# Altium PCB PCB1.PcbDoc
Units mil, origin at the board's own origin, x right, y up, seen from the top; angles counter-clockwise.
Board outline 2175 x 2390 mil, 2 copper layers (Top Layer, Bottom Layer); 56 components, 46 nets, 213 pads, 50 vias.
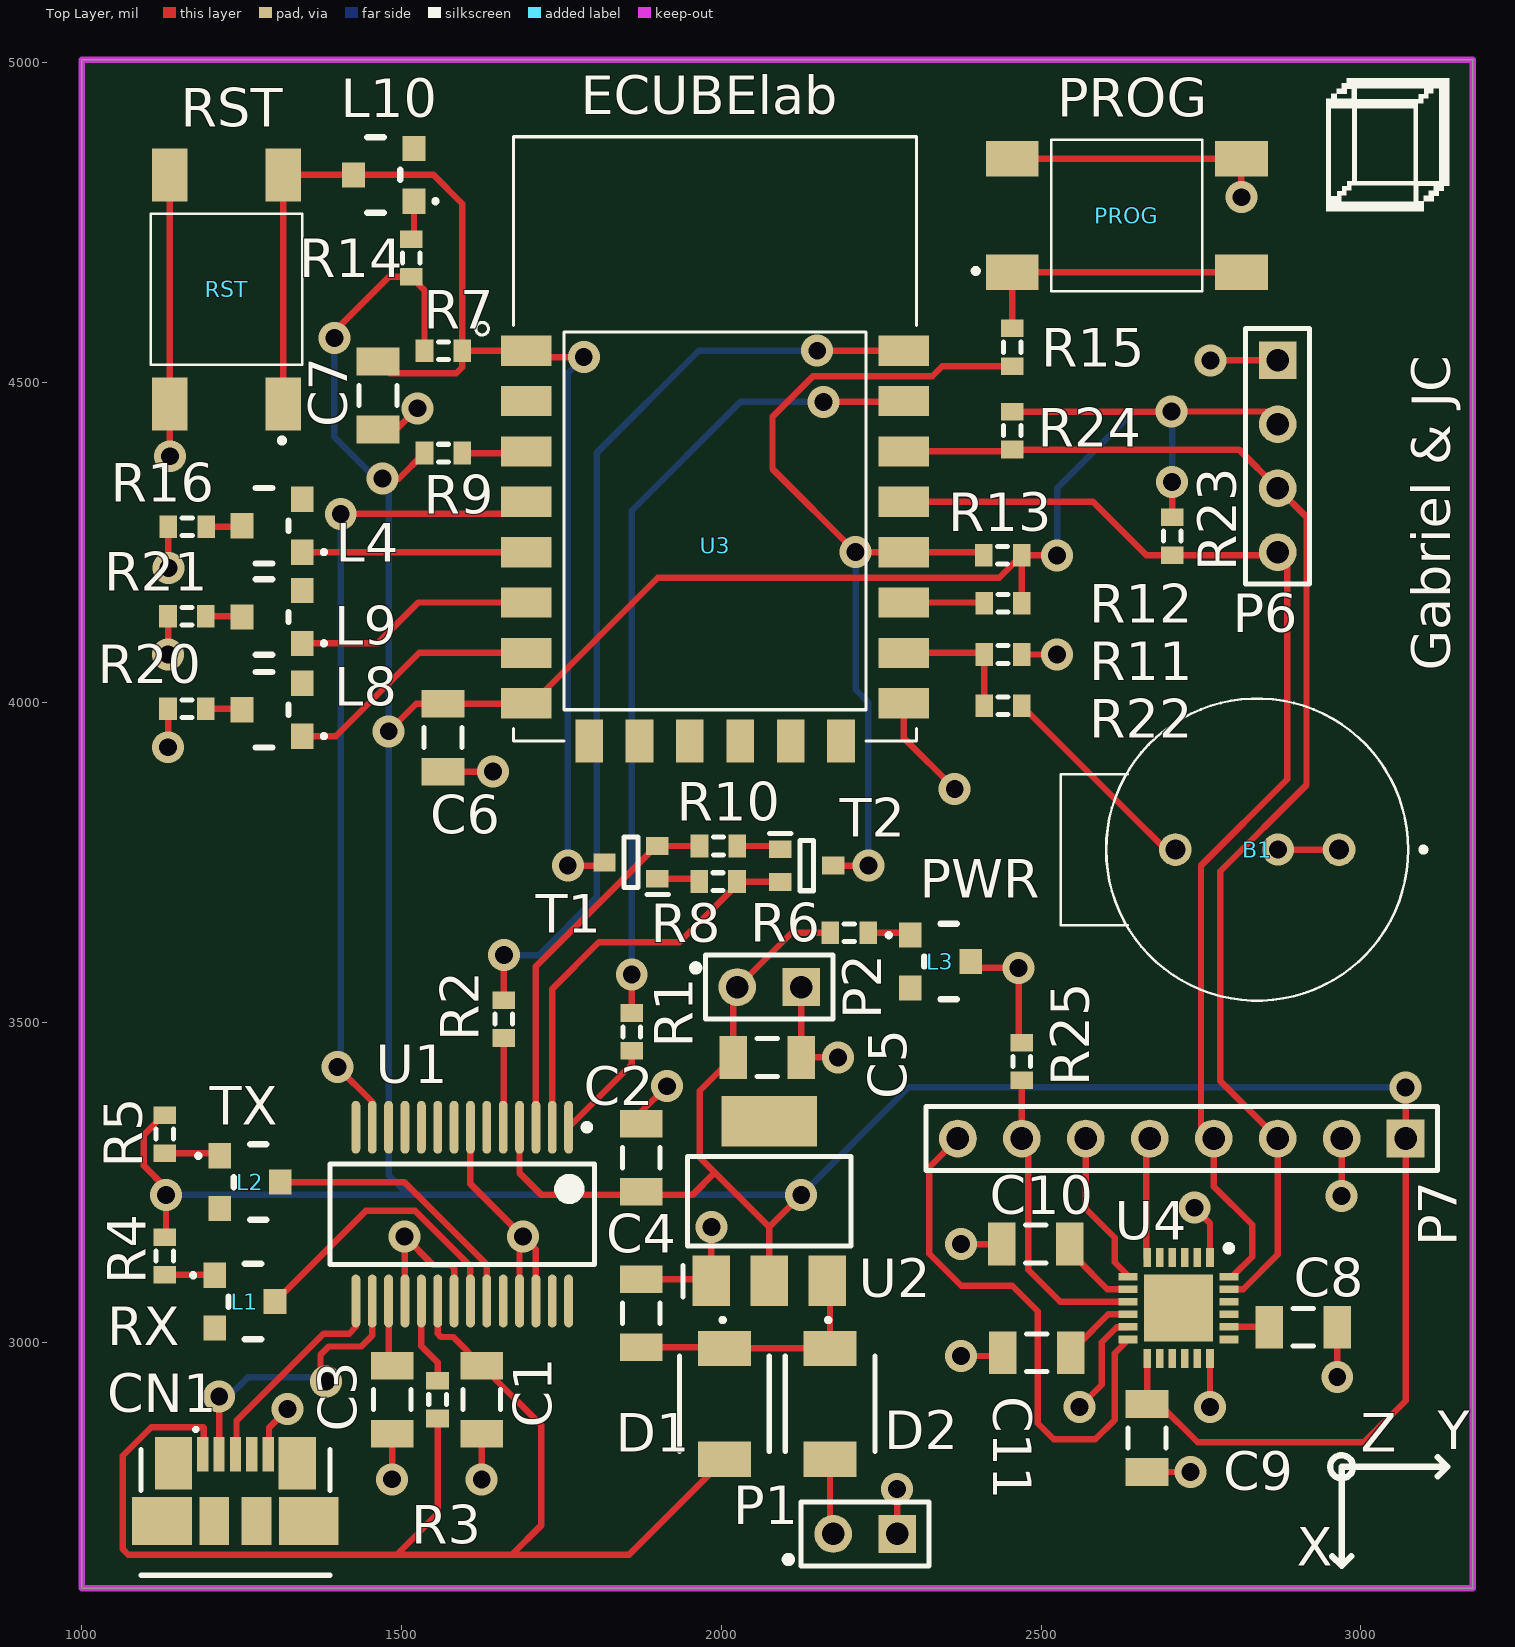
[diagram p0: Top Layer view]
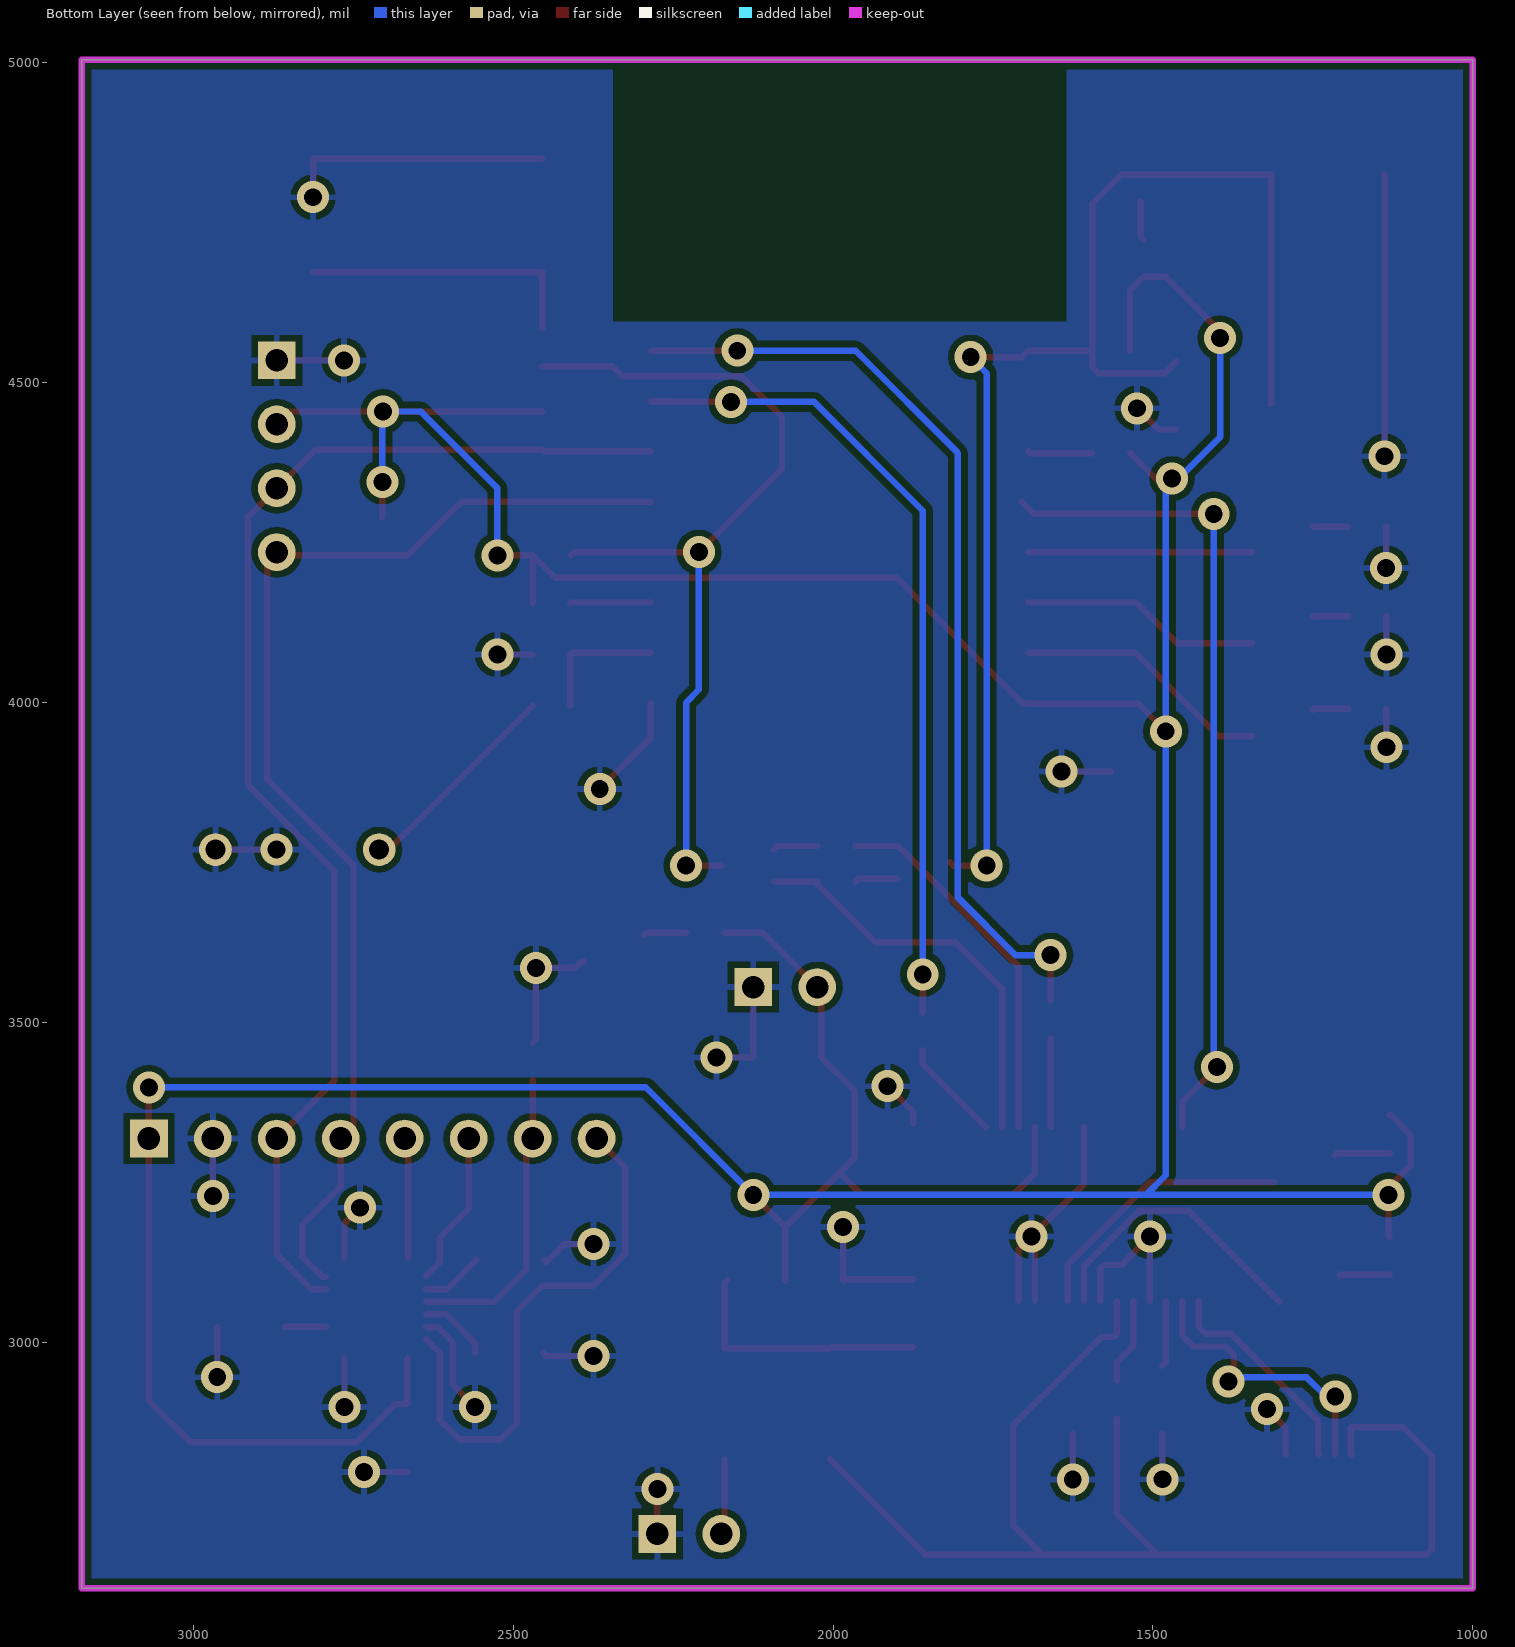
[diagram p1: Bottom Layer view, seen from below]

## Layer stack, top to bottom
Top Solder: solder mask 0.4, Solder Resist, Dk 3.5
Top Layer: signal copper 1.4
Dielectric 1: dielectric 12.6, FR-4, Dk 4.8
Bottom Layer: signal copper 1.4
Bottom Solder: solder mask 0.4, Solder Resist, Dk 3.5

## Board outline
1000,2615 3175,2615 3175,5005 1000,5005

## Design rules (kind name [scope] priority, off if disabled: settings)
Clearance [All] p1: gap=10 ignorepadtopadclearanceinfootprint=FALSE except(0: Arc-Hole Track-Hole SMDPad-Hole THPad-Hole Via-Hole Fill-Hole Poly-Hole Region-Hole Text-Hole)
PolygonConnect [All] p1: connectstyle=Relief reliefconductorwidth=10 reliefentries=4 polygonreliefangle="90 Angle" airgapwidth=10
RoutingVias [All] p1: holewidth=28 width=50 viastyle="Through Hole" minholewidth=28 minwidth=50 maxholewidth=28 maxwidth=50
SolderMaskExpansion [All] p1: expansion=4
Width [All] p1: maxlimit=10 minlimit=10 preferedwidth=10
30 further rules are at their usual default settings.

## Classes and differential pairs
component class usb_uart: C1 C2 C3 C4 C5 CN1 D1 D2 L1 L2 L3 P1 P2 R1 R2 R3 R4 R5 R6 U1 U2
component class processingsys: B1 C6 C7 i2c L4 L8 L9 L10 P6 PROG R7 R8 R9 R10 R11 R12 R13 R14 R15 R16 R20 R21 R22 R23 R24 RST T1 T2 U3
component class mpu6050: C8 C9 C10 C11 P7 R25 U4

## Components (designator, comment, footprint, x,y, rotation, side; value= is the part's Value field where it differs from the comment)
B1 "MCABT-408-RC" MCABT-408-RC 2965.91,3770 r180 top
C1 "Cap Semi" C1206 1625.43,2910 r90 top value=10uF
C2 "Cap Semi" C1206 1875,3288.15 r270 top value=10uF
C3 "Cap Semi" C1206 1485.43,2910 r90 top value=100nF
C4 "Cap Semi" C1206 1875,3045 r270 top value=10uF
C5 "Cap Semi" C1206 2071.85,3445 r0 top value=10uF
C6 "Cap Semi" C1206 1565,3945 r90 top value=47uF
C7 "Cap Semi" C1206 1463.28,4480 r90 top value=100nF
C8 "Cap Semi" C1206 2909.96,3023.19 r180 top value=2200pF
C9 "Cap Semi" C1206 2665.75,2850.04 r90 top value=100nF
C10 "Cap Semi" C1206 2491.81,3153.19 r0 top value=10nF
C11 "Cap Semi" C1206 2493.11,2983.19 r0 top value=100nF
CN1 "47346-1001" 47346-1001 1240.33,2635.35 r180 top
D1 "PMEG3020DEP,115" SOD-128 2005,2903.39 r270 top
D2 "PMEG3020DEP,115" SOD-128 2170,2903.39 r270 top
L1 "KM-23" SOT-23 1207.83,3021.85 r90 top
L2 "KM-23" SOT-23 1215.98,3208.66 r90 top
L3 "KM-23" SOT-23 2295.51,3553.66 r90 top
L4 "KM-23" SOT-23 1345,4317.68 r270 top
L8 "KM-23" SOT-23 1345,4030 r270 top
L9 "KM-23" SOT-23 1345,4175 r270 top
L10 "KM-23" SOT-23 1519.49,4866.34 r270 top
P1 "Header 2" HDR1X2 2275,2700 r180 top
P2 "Header 2" HDR1X2 2125,3555 r180 top
P6 "Header 4" HDR1X4 2870,4535 r270 top
P7 "Header 8" HDR1X8 3069.96,3318.19 r180 top
PROG "FSM2JSMASTR" BUTTON_SMD 2453.62,4671.42 r90 top (schematic designator B3)
R1 "Res3" J1-0603 1860,3485 r90 top value=1K
R2 "Res3" J1-0603 1660,3505 r90 top value=1K
R3 "Res3" J1-0603 1556.38,2910 r90 top value=12K
R4 "Res3" J1-0603 1130,3134.53 r90 top value=65
R5 "Res3" J1-0603 1130,3325 r90 top value=65
R6 "Res3" J1-0603 2200,3640 r180 top value=65
R7 "Res3" J1-0603 1565.47,4550 r0 top value=12K
R8 "Res3" J1-0603 1995,3720 r180 top value=12K
R9 "Res3" J1-0603 1565.47,4390 r0 top value=12K
R10 "Res3" J1-0603 1995.47,3775.59 r180 top value=12K
R11 "Res3" J1-0603 2440.47,4075 r180 top value=12K
R12 "Res3" J1-0603 2440.47,4155 r180 top value=12K
R13 "Res3" J1-0603 2440,4230 r180 top value=12K
R14 "Res3" J1-0603 1515,4695 r270 top value=65
R15 "Res3" J1-0603 2455,4555.47 r270 top value=1K
R16 "Res3" J1-0603 1165,4275 r180 top value=65
R20 "Res3" J1-0603 1164.53,3990 r180 top value=65
R21 "Res3" J1-0603 1164.53,4135 r180 top value=65
R22 "Res3" J1-0603 2440.47,3995 r0 top value=1K
R23 "Res3" J1-0603 2705,4260 r90 top value=4.7K
R24 "Res3" J1-0603 2455,4425 r90 top value=4.7K
R25 "Res3" J1-0603 2469.96,3438.66 r90 top value=4.7K
RST "FSM2JSMASTR" BUTTON_SMD 1316.42,4465.35 r180 top (schematic designator B2)
T1 "SBC846BWT1G" SOT-323 1858.66,3750 r180 top
T2 "SBC846BWT1G" SOT-323 2133.66,3745 r0 top
U1 "FT232RL-Reel" SSOP-28_N 1595,3200 r270 top
U2 "NCP1117ST33T3G" SOT-223-3 2075,3230 r90 top
U3 "ESP8266-12E" ESP8266-12E 1990.28,4274.41 r0 top
U4 "MPU-6050" QFN50P400X400X95-25N 2714.96,3053.19 r270 top

## Footprints (in the part's own frame and the unit in brackets; to place one, negate y for a bottom-side part, rotate by r counter-clockwise, add the part's x,y. Pads: shape width x height; smd on the part's side, far side on the other; paste and mask are expansions set on the pad)
47346-1001 [mm] "USB Tipo B Montaje Superficial"
  rect 0.45x1.38 smd: 1(1.3,-4.81) 2(0.65,-4.81) 3(0,-4.81) 4(-0.65,-4.81) 5(-1.3,-4.81)
  rect 1.475x2.1 smd: 6(-2.452,-4.45) 7(2.452,-4.45)
  rect 1.175x1.9 smd: 8(0.837,-2.15) 9(-0.837,-2.15)
  rect 2.375x1.9 smd: 10(2.913,-2.15) 11(-2.913,-2.15)
  silkscreen extent -3.75,-5.84 3.75,0
BUTTON_SMD [mm]
  rect 1.4x2.1 smd: 1(0.036,-0.035) 2(0.036,-9.135) 3(4.536,-0.035) 4(4.536,-9.135)
  silkscreen extent -0.71,-7.58 5.29,1.51, body extent -0.76,-7.62 5.21,-1.65, height 2.03
C1206 [mm] "Chip Capacitor, Body 3.2x1.6mm, IPC High Density"
  rect 1.1x1.7 smd: 1(-1.35,0) 2(1.35,0)
  silkscreen extent -0.4,-0.75 0.4,0.75, body extent -1.7,-0.9 1.7,0.9, height 1.3
ESP8266-12E [mm]
  rect 2x1.2 smd: 1(-7.5,7) 2(-7.5,5) 3(-7.5,3) 4(-7.5,1) 5(-7.5,-1) 6(-7.5,-3) 7(-7.5,-5) 8(-7.5,-7) 15(7.5,-7) 16(7.5,-5) 17(7.5,-3) 18(7.5,-1) 19(7.5,1) 20(7.5,3) 21(7.5,5) 22(7.5,7)
  rect 1.1x1.7 smd: 9(-5,-8.5) 10(-3,-8.5) 11(-1,-8.5) 12(1,-8.5) 13(3,-8.5) 14(5,-8.5)
  silkscreen extent -9.5,-8.5 8,15.5
HDR1X2 [mm] "Connector; Header; 2 Position"
  rect 1.5x1.5 hole 0.9: 1(0,0)
  round 1.5 hole 0.9: 2(2.54,0)
  silkscreen extent -1.27,-1.27 3.81,1.27
HDR1X4 [mm] "Connector; Header; 4 Position"
  rect 1.5x1.5 hole 0.9: 1(0,0)
  round 1.5 hole 0.9: 2(2.54,0) 3(5.08,0) 4(7.62,0)
  silkscreen extent -1.27,-1.27 8.89,1.27
HDR1X8 [mm] "Connector; Header; 8 Position"
  rect 1.5x1.5 hole 0.9: 1(0,0)
  round 1.5 hole 0.9: 2(2.54,0) 3(5.08,0) 4(7.62,0) 5(10.16,0) 6(12.7,0) 7(15.24,0) 8(17.78,0)
  silkscreen extent -1.27,-1.27 19.05,1.27
J1-0603 [mm] "Chip Resistor, Body 1.6x0.8mm, IPC High Density"
  rect 0.7x0.9 smd: 1(-0.75,0) 2(0.75,0)
  silkscreen extent -0.2,-0.35 0.2,0.35, body extent -0.85,-0.48 0.85,0.48, height 0.9
MCABT-408-RC [mm]
  round 1.3 hole 0.8: 1(0,0) 2(6.5,0)
  silkscreen extent -3.45,-6 11.05,6, body extent -1.78,-4.95 10.92,5.21, height 5.08
QFN50P400X400X95-25N [mm]
  rect 0.75x0.3 smd: 1(-2,1.25) 2(-2,0.75) 3(-2,0.25) 4(-2,-0.25) 5(-2,-0.75) 6(-2,-1.25) 13(2,-1.25) 14(2,-0.75) 15(2,-0.25) 16(2,0.25) 17(2,0.75) 18(2,1.25)
  rect 0.3x0.75 smd: 7(-1.25,-2) 8(-0.75,-2) 9(-0.25,-2) 10(0.25,-2) 11(0.75,-2) 12(1.25,-2) 19(1.25,2) 20(0.75,2) 21(0.25,2) 22(-0.25,2) 23(-0.75,2) 24(-1.25,2)
  rect 2.65x2.75 smd: 25(0,0)
  silkscreen extent -2.5,1.88 -2.25,2.13, body extent -2.05,-2.05 2.05,2.05, height 0.95
SOD-128 [mm]
  rect 1.4x2.1 smd: 1(-2.2,0) 2(2.2,0)
  silkscreen extent -3.39,-1.78 1.89,1.78, body extent -1.91,-1.78 1.91,1.78, height 1.08
SOT-23 [mm]
  rect 1x0.9 smd: 1(2.1,0) 2(0,0) 3(1.05,-2.4)
  silkscreen extent -0.45,-1.85 2.55,0.89, body extent -0.51,-1.91 2.54,-0.38, height 1.27
SOT-223-3 [mil]
  rect 79x59 smd: 1(-133.86,90.55) 2(-133.86,0) 3(-133.86,-90.55)
  rect 79x150 smd: 4(115,0)
  silkscreen extent -159,-128 60,135, body extent -80,-130 60,125, height 50
SOT-323 [mil]
  rect 35x28 smd: 1(-41.34,25.59) 2(-41.34,-25.59) 3(41.34,0)
  silkscreen extent -58,-39 11,50, body extent -41,-39 41,39, height 43
SSOP-28_N [mm] "SOP, 28-Leads, Body 10.2x5.3mm, Pitch 0.65mm, IPC Medium Density"
  oval 2.1x0.35 smd: 1(-3.45,4.225) 2(-3.45,3.575) 3(-3.45,2.925) 4(-3.45,2.275) 5(-3.45,1.625) 6(-3.45,0.975) 7(-3.45,0.325) 8(-3.45,-0.325) 9(-3.45,-0.975) 10(-3.45,-1.625) 11(-3.45,-2.275) 12(-3.45,-2.925) 13(-3.45,-3.575) 14(-3.45,-4.225) 15(3.45,-4.225) 16(3.45,-3.575) 17(3.45,-2.925) 18(3.45,-2.275) 19(3.45,-1.625) 20(3.45,-0.975) 21(3.45,-0.325) 22(3.45,0.325) 23(3.45,0.975) 24(3.45,1.625) 25(3.45,2.275) 26(3.45,2.925) 27(3.45,3.575) 28(3.45,4.225)
  silkscreen extent -3.57,-5.25 2,5.25, body extent -2.8,-5.25 2.8,5.25, height 2

## Part data
B1: "ransductor, 1 V a 3 V, 85 dBA, Sirena, 70 mA", Current Rating=70mA, Manufacturer=Multicomp, Max Supply Voltage=3V, Min Supply Voltage=1V, Self Resonant Frequency=2.731kHz, ComponentLink1Description=farnell, ComponentLink1URL=https://es.farnell.com/multicomp/mcabt-408-rc/ac-stico-electro-mech-audio-1/dp/2361105?krypto=Kzr7701dNdWkobLwazw2WAHmNHziskZrQMg7S%2Faf%2BaL%2F%2Bj%2FkWh1M3S1k%2FYSHSKSx0MzERa16wH8IxUPYeDKx2PmCEW9b7Qq2dWm4YJR83SHnond9nZgPFyrqEJusaoJIK60fC%2FoQdI36P39N2BQPzNsuueVDbqXwGAOKtHeDF30EVb%2FMeWA5wOoM2bNdaZFSgNjAKDp4mZigEnbiecpx7MGL6JOzzhP9BWUiYbys6ks5dt9LMNmTnpFtdjo7H2akCj%2F%2BfLNG71ArvMaoxZ0WMv4hKuovOAWfA3NHFC9HmqzoIwqKqKgSbKZowJ%2Btqn8YlCHLgv9T7vbfNqK3ZjJzUnVd%2FT%2BsNsbTS0FSkhssYu9EDD5ZGkWROWS0H93J6TpgHhXKvnZj%2BSUvRf0Y%2Bf3ZsPXOKqdIdoKAc%2FpA98XWUfDfcYNhjP%2Fdf3fuxTewHmiKE8rVjXfHvkQUwmS1KThmixSSWsU6BPdfoeHtQ48EBKM%3D&ddkey=https%3Aes-ES%2FElement14_Spain%2Fsearch, ComponentLink2Description=http://www.farnell.com/datasheets/1768519.pdf, ComponentLink2URL=http://www.farnell.com/datasheets/1768519.pdf, Height=7.5mm, Manufacturer Part Number=MCABT-408-RC, Outside Diameter=12mm, Pricing 1="1=0.967, 5=0.876, 10=0.795, 20=0.738, 40=0.723, 100=0.708, 500=0.694 (EUR)", REACH SVHC=Unknown, Stock 1=1057, Supplier 1=Farnell
C1 C2 C3 C4 C5 C6 C7 C8 C9 C10 C11: "Capacitor (Semiconductor SIM Model)", LatestRevisionDate=29-May-2009, LatestRevisionNote="IPC-7351 Footprint Added.", PackageDescription="Chip Capacitor", PackageReference=C1206, Published=8-Jun-2000, Publisher="Altium Limited"
CN1: "MOLEX - 47346-1001 - MULTIPOLE CONNECTOR Conector USB, Micro USB Tipo B, USB 2.0 Montaje Superficial,", Manufacturer=Molex, Max Operating Temperature=85°C, Min Operating Temperature=-30°C, ComponentLink1Description=Farnell, ComponentLink1URL=https://es.farnell.com/molex/47346-1001/conector-micro-usb-tipo-b-hembra/dp/2782045?st=Conector%20USB,%20Micro%20USB%20Tipo%20B, Contact Material="Copper Alloy", Contact Plating=Gold, Halogen Free="Low Halogen", Housing Material=Polymer, Length=7.8mm, Manufacturer Part Number=47346-1001, Mount="Surface Mount", Number of Circuits=5, Orientation="Right Angle", Pitch=0.65mm, Pricing 1="1=0.624, 60=0.6, 200=0.556, 500=0.532, 1000=0.503 (EUR)", REACH SVHC="No SVHC", Stock 1=336, Supplier 1=Farnell, Termination=Solder
D1 D2: "NEXPERIA - Rectificador Schottky, 30 V, 2 A", Average Rectified Current=2A, Forward Voltage=520mV, Manufacturer="NXP Semiconductors", Max Operating Temperature=150°C, Max Power Dissipation=625mW, Max Repetitive Reverse Voltage (Vrrm)=30V, Max Reverse Leakage Current=50uA, Max Surge Current=50A, Min Operating Temperature=-55°C, Package Quantity=3000, Supplier Part Number 1=1972721, ComponentLink1Description=farnell, ComponentLink1URL=https://es.farnell.com/nexperia/pmeg3020dep-115/diodo-schott-rect-30v-2a-sod128/dp/1972721?st=PMEG3020DEP,115, ComponentLink2Description=http://www.nxp.com/documents/data_sheet/PMEG3020DEP.pdf?ecmp=mouser, ComponentLink2URL=http://www.nxp.com/documents/data_sheet/PMEG3020DEP.pdf?ecmp=mouser, ComponentLink3Description=http://www.nxp.com/documents/data_sheet/PMEG3020DEP.pdf, ComponentLink3URL=http://www.nxp.com/documents/data_sheet/PMEG3020DEP.pdf, Element Configuration=Single, Forward Current=2A, Lead Free="Lead Free", Manufacturer Part Number=PMEG3020DEP,115, Max Reverse Voltage (DC)=30V, Mount="Surface Mount", Number of Pins=2, Packaging="Tape and Reel", Peak Non-Repetitive Surge Current=50A, Peak Reverse Current=50uA, Pricing 1="5=0.351, 25=0.27, 100=0.189, 250=0.167, 500=0.145, 1000=0.123, 5000=0.106 (EUR)", Radiation Hardening=No, Stock 1=4, Supplier 1=Farnell
L1 L2 L3 L4 L8 L9 L10: "Kingbright - LED, SOT-23", Case/Package=SOT-23, Colour=Red, Forward Current=20mA, Forward Voltage=2V, Lens Colour=Clear, Manufacturer=Kingbright, Manufacturer Part Number=KM-23ID-F, ComponentLink1Description="farnell -RED", ComponentLink1URL=https://es.farnell.com/kingbright/km-23id-f/led-red-sot-23-smd/dp/2099216?st=KM-23ID, ComponentLink2Description=farnell-Green, ComponentLink2URL=https://es.farnell.com/kingbright/km-23sgd-f/led-green-sot-23-smd/dp/2099217?st=KM-23, ComponentLink3Description=http://www.farnell.com/datasheets/1563685.pdf, ComponentLink3URL=http://www.farnell.com/datasheets/1563685.pdf, ComponentLink4Description=https://www.distrelec.biz/Web/Downloads/d_/en/cuKingbright_SOT-23_SMT-LED_EN.pdf?mime=application%2Fpdf, ComponentLink4URL=https://www.distrelec.biz/Web/Downloads/d_/en/cuKingbright_SOT-23_SMT-LED_EN.pdf?mime=application%2Fpdf, ComponentLink5Description=http://uk.rs-online.com/webdocs/032f/0900766b8032f166.pdf, ComponentLink5URL=http://uk.rs-online.com/webdocs/032f/0900766b8032f166.pdf, ComponentLink6Description=http://www.produktinfo.conrad.com/datenblaetter/175000-199999/180090-da-01-en-LED_SOT23_TYP_KM_23ID_F.pdf, ComponentLink6URL=http://www.produktinfo.conrad.com/datenblaetter/175000-199999/180090-da-01-en-LED_SOT23_TYP_KM_23ID_F.pdf, ComponentLink7Description=http://www.produktinfo.conrad.com/datenblaetter/125000-149999/144223-da-01-en-SMD_Leuchtdioden_KM23ID_Sot23_rot.pdf, ComponentLink7URL=http://www.produktinfo.conrad.com/datenblaetter/125000-149999/144223-da-01-en-SMD_Leuchtdioden_KM23ID_Sot23_rot.pdf, Dominant Wavelength=625nm, Height=1mm, Length=2.8mm, Lens Style=Colored,Diffused,Rectangular, Luminous Intensity=12mcd, Mount="Surface Mount", Number of LEDs=1, Number of Pins=3, Pricing 1="5=0.118, 25=0.112, 100=0.106, 250=0.101, 500=0.0968, 1000=0.0928 (GBP)", Radiation Hardening=No, REACH SVHC="No SVHC", Stock 1=10839, Supplier 1=Farnell, Viewing Angle=140°, Wavelength=625nm, Width=1.2mm
P1 P2: "Header, 2-Pin", LatestRevisionDate=17-Jul-2002, LatestRevisionNote="Re-released for DXP Platform.", Publisher="Altium Limited"
P6: "Header, 4-Pin", LatestRevisionDate=17-Jul-2002, LatestRevisionNote="Re-released for DXP Platform.", Publisher="Altium Limited"
P7: "Header, 8-Pin", LatestRevisionDate=17-Jul-2002, LatestRevisionNote="Re-released for DXP Platform.", Publisher="Altium Limited"
PROG RST: "TE Connectivity - Interruptor Táctil, Montaje Superficial (SMD)", Case/Package=SMD/SMT, Contact Current Rating=50mA, Manufacturer="TE Connectivity", Manufacturer Part Number=1977223-4, Max Operating Temperature=105°C, Max Voltage Rating (DC)=24V, Min Operating Temperature=-40°C, Operating Force=1.57N, Actuator Length=0.7mm, Actuator Material=Nylon, ComponentLink1Description=farnell, ComponentLink1URL=https://es.farnell.com/alcoswitch-te-connectivity/fsm2jsmastr/interruptor-t-ctil-spst-0-05a/dp/2610941?krypto=STQKwvVYAPccPvWo2qKFm%2B2gHuVF7WkaqIiu7Dm0cJ5iCIeV7DHhPViRfCOgoFsJStXtod%2BnIQ%2BYkMVEvW6iM3AuzhepTn6uOw1UVwc7VB8KUrNLl0uQiR%2Bt35da8c9%2BQU171xU6PFtEc8EnsSVD6zTrAoZNeFTntAPThe1lSw75SwgbO5cQ33JndyglwNSD%2Fmpse8Gtvc2qmuIyzAgV9svHZkncDZZX6ZXbcKP216NPBEjbrtNYbKi2SeLDw4XeR8vtbf5NJKVxMUwbBhIrG2GTfYXybkb4t0M%2BFUX2Mjpm2Pqiy7%2FaHyLXsF%2F6JqWeJ%2FtTnNjkvf4o7u918wSV9RxDYtXvBiLcNJGrHbUuu6%2BAwcACzT8Mk6xWTk1NrmLNmfrigBPTmYlqdrRkSyqTCN5s9fVyopuyy4jhDrGN6PxrQet12eg7oAfq92u%2FGproWwHxsaTab23LGvFEnuMkIb5ATL7w%2Fr2VOeHmcwkXp7E%3D&ddkey=https%3Aes-ES%2FElement14_Spain%2Fsearch, ComponentLink2Description=http://www.te.com/commerce/DocumentDelivery/DDEController?Action=srchrtrv&DocNm=1308111-1_SWITCHES_CORE_PROGRAM_CATALOG&DocType=Catalog+Section&DocLang=English, ComponentLink2URL=http://www.te.com/commerce/DocumentDelivery/DDEController?Action=srchrtrv&DocNm=1308111-1_SWITCHES_CORE_PROGRAM_CATALOG&DocType=Catalog+Section&DocLang=English, Contact Material="Copper Alloy", Contact Plating=Silver, Depth=10mm, ELV=Compliant, Length=6mm, Max Current Rating=50mA, Mechanical Life=1000000Cycles, Mount="Surface Mount", Orientation=Straight, Packaging="Tape and Reel", Pricing 1="5=0.184, 100=0.179, 250=0.173, 1000=0.168, 2500=0.162 (EUR)", Radiation Hardening=No, Stock 1=1514, Supplier 1=Farnell, Termination="Gull Wing", Throw Configuration=SPST, Type=Switch, Voltage Rating (DC)=24V
R1 R2 R3 R4 R5 R6 R7 R8 R9 R10 R11 R12 R13 R14 R15 R16 R20 R21 R22 R23 R24 R25: "Resistor", LatestRevisionDate=29-May-2009, LatestRevisionNote="IPC-7351 Footprint Added.", PackageDescription="Chip Resistor", PackageReference=J1-0603, Published=8-Jun-2000, Publisher="Altium Limited"
T1 T2: "ON SEMICONDUCTOR - SBC846BWT1G - TRANSISTOR, BIPOL, NPN, 65V", Case/Package=SC, Collector Base Voltage (VCBO)=80V, Collector Emitter Breakdown Voltage=65V, Collector Emitter Saturation Voltage=600mV, Emitter Base Voltage (VEBO)=6V, Frequency=100MHz, Manufacturer="ON Semiconductor", Max Collector Current=100mA, Max Operating Temperature=150°C, Max Power Dissipation=150mW, Min Operating Temperature=-55°C, Package Quantity=3000, Collector Emitter Voltage (VCEO)=65V, ComponentLink1Description=farnell, ComponentLink1URL=https://es.farnell.com/on-semiconductor/sbc846bwt1g/transistor-bipolar-npn-65-v/dp/2533346?st=SBC846BWT1G, ComponentLink2Description=http://www.mouser.com/ds/2/308/BC846AWT1-D-103558.pdf, ComponentLink2URL=http://www.mouser.com/ds/2/308/BC846AWT1-D-103558.pdf, ComponentLink3Description=http://www.onsemi.com/pub/Collateral/BC846AWT1-D.PDF, ComponentLink3URL=http://www.onsemi.com/pub/Collateral/BC846AWT1-D.PDF, Element Configuration=Single, Gain Bandwidth Product=100MHz, Halogen Free="Halogen Free", Lead Free="Lead Free", Manufacturer Part Number=SBC846BWT1G, Max Breakdown Voltage=65V, Number of Elements=1, Number of Pins=3, Packaging="Tape and Reel", Polarity=NPN, Power Dissipation=150mW, Pricing 1="150=0.0932, 250=0.0803, 500=0.0675, 1000=0.0545, 5000=0.0456 (EUR)", Radiation Hardening=No, REACH SVHC="No SVHC", Stock 1=0, Supplier 1=Farnell, Transition Frequency=100MHz
U1: "USB UART Asynchronous Serial Data Transfer Chip, SSOP-28, Tape and Reel", ComponentLink1Description="Manufacturer Link", ComponentLink1URL=http://www.ftdichip.com/Products/ICs/FT232R.htm, ComponentLink2Description=Datasheet, ComponentLink2URL=http://www.ftdichip.com/Support/Documents/DataSheets/ICs/DS_FT232R.pdf, DatasheetVersion="ver 2.07, Jul-2010", PackageDescription="28-Pin Small Outline Package 0.65 mm Pitch", PackageReference=SSOP-28, PackageVersion=2010, Published=19-Aug-2010, Publisher="Altium Limited"
U2: "ON SEMICONDUCTOR  - Regulador de Tensión Fija LDO 3.3V 1A", Case/Package=SOT-223, Dropout Voltage=1.07V, Input Bias Current=6mA, Manufacturer="ON Semiconductor", Max Input Voltage=20V, Max Operating Temperature=125°C, Max Output Current=1A, Max Output Voltage=3.3V, Max Supply Voltage=15V, Min Input Voltage=3.5V, Min Operating Temperature=0°C, Min Supply Voltage=4.75V, Output Voltage Accuracy=1%, Package Quantity=1, Quiescent Current=10mA, Reference Voltage=1.25V, Accuracy=1%, ComponentLink1Description=farnell, ComponentLink1URL=https://es.farnell.com/on-semiconductor/ncp1117st33t3g/ic-linear-voltage-regulator/dp/1652366?st=NCP1117ST33T3G, ComponentLink2Description=http://www.onsemi.ru.com/pub/Collateral/NCP1117-D.PDF, ComponentLink2URL=http://www.onsemi.ru.com/pub/Collateral/NCP1117-D.PDF, ComponentLink3Description=http://www.farnell.com/datasheets/1726422.pdf, ComponentLink3URL=http://www.farnell.com/datasheets/1726422.pdf, ComponentLink4Description=http://www.onsemi.com/pub/Collateral/NCP1117-D.PDF, ComponentLink4URL=http://www.onsemi.com/pub/Collateral/NCP1117-D.PDF, ComponentLink5Description=https://www.verical.com/server-webapp/html/getDatasheet?partID=82718, ComponentLink5URL=https://www.verical.com/server-webapp/html/getDatasheet?partID=82718, ComponentLink6Description=http://www.farnell.com/datasheets/1748260.pdf, ComponentLink6URL=http://www.farnell.com/datasheets/1748260.pdf, ComponentLink7Description=http://www.onsemi.com/pub_link/Collateral/NCP1117-D.PDF, ComponentLink7URL=http://www.onsemi.com/pub_link/Collateral/NCP1117-D.PDF, Contact Plating=Matte,Tin, Halogen Free="Halogen Free", Height=1.69mm, Lead Free="Lead Free", Length=6.7mm, Manufacturer Part Number=NCP1117ST33T3G, Min Current Limit=1A, Min Output Voltage=3.3V, Mount="Surface Mount", Nominal Output Voltage=3.3V, Number of Outputs=1, Number of Pins=3, Number of Regulators=1, Output Current=1A, Output Type=Fixed, Output Voltage=3.3V, Packaging="Tape and Reel", Polarity=Positive, Pricing 1="150=0.196, 250=0.174, 500=0.151, 1000=0.129, 5000=0.121, 10000=0.116 (EUR)", Radiation Hardening=No, REACH SVHC="No SVHC", Stock 1=0, Supplier 1=Farnell, Termination=SMD/SMT, Width=3.7mm
U3: Case/Package=Module, Current - Receiving=56mA, Current - Transmitting=170mA, Frequency=2.4GHz, Manufacturer="Adafruit Industries", Manufacturer Part Number=2491, Max Operating Temperature=125°C, Min Operating Temperature=-40°C, Data Rate=72.2Mbps, Interface=I2C,SPI,UART, Mount="Surface Mount", Packaging=Bulk, Sensitivity=-91dBm, Stock 1=0, Supplier 1=Mouser
U4: "INVENSENSE - Módulo MEMS, Giroscopio de Tres Ejes, Acelerómetro de Tres Ejes", Case/Package=QFN, Manufacturer="TDK InvenSense", Max Operating Temperature=85°C, Max Supply Voltage=3.6V, Min Operating Temperature=-40°C, Min Supply Voltage=2.5V, Package Quantity=5000, ComponentLink1Description=farnell, ComponentLink1URL=https://es.farnell.com/invensense/mpu-6050/giroscop-aceler-m-6-ejes-i2c-qfn/dp/1864742?st=MPU-6050, ComponentLink2Description=http://www.farnell.com/datasheets/1788002.pdf, ComponentLink2URL=http://www.farnell.com/datasheets/1788002.pdf, Height=0.9mm, Interface=I2C, Length=4.1mm, Manufacturer Part Number=MPU-6050, Mount="Surface Mount", Number of Pins=24, Output Type=Digital, Packaging="Cut Tape", REACH SVHC="No SVHC", Sensitivity=16384LSB/g, Stock 1=0, Supplier 1=Farnell, Width=4.1mm

## Via types
v1: diameter 50, hole 28, Top Layer to Bottom Layer, 50 vias

## Nets (pads, with @x,y where several pads share a name; then routed paths per layer and width w, separated by ;. In a path a pad name is that pad's centre, name@x,y a point inside that pad or via, vN(x,y) a via of type N, cw(c..) or ccw(c..) an arc to the next point about the centre after c; other vN are vias at no path point)
3.3VCC: C2.2 C5.1 C6.2 C9.2 P2.2 P6.2 P7.1 R4.2 R5.2 R6.2 R7.1 R9.1 R12.1 R13.1 R14.2 R23.2 R24.2 U1.4 U2.2 U3.8 U4.13 | length 8353.5
  Top Layer w10: R4.2 1131.81,3165.87 v1(1131.81,3230) 1131.81,3240.95 1097.28,3275.48 1097.28,3324.09 1127.72,3354.53 R5.2 ; v1(1395,4570) 1395,4580 1480.47,4665.47 R14.2 1535.94,4644.53 R7.1 ; v1(1470,4350) 1495.94,4350 R9.1 ; v1(1480,3955) 1523.15,3998.15 C6.2 1694.33,3998.15 U3.8 1704.29,3998.82 1900.47,4195 2434.53,4195 R13.1 ; U1.4 1684.57,3264.24 1718.81,3230 1955,3230 1990,3265 ; U2.2 2075,3180 ; v1(2125,3230) 2075,3180 ; R6.2 2110,3640 P2.2 2018.7,3548.7 C5.1 1966.46,3392.76 1966.46,3288.54 1990,3265 ; R24.2 2703.27,4454.53 v1(2703.74,4455) 2850,4455 P6.2 ; R12.1 2470,4159.53 2469.53,4160 R13.1 ; v1(2525,4230) R13.1 ; U4.13 C9.2 2684.96,2903.19 2744.96,2843.19 3004.96,2843.19 3069.96,2908.19 P7.1 v1(3069.96,3398.19) ; R23.2 v1(2705,4345) ; 1990,3265 2075,3180
  Bottom Layer w10: v1(1131.81,3230) 1510.95,3230 ; v1(1395,4570) 1395,4415.13 1460.13,4350 v1(1470,4350) 1480,4340 v1(1480,3955) 1480,3260.95 1510.95,3230 ; v1(2525,4230) 2525,4335 2645,4455 v1(2703.74,4455) 2705,4453.74 v1(2705,4345) ; v1(3069.96,3398.19) 2293.19,3398.19 v1(2125,3230) 1510.95,3230
5VCC: C1.2 CN1.1 D1.2 R3.1 U1.20 | length 2074.6
  Top Layer w10: CN1.1 1190.89,2824.72 1190.89,2866.09 1190.08,2866.89 1108.53,2866.89 1063.92,2822.28 1063.92,2676.39 1072.7,2667.6 1492.6,2667.6 ; R3.1 1556.38,2731.38 1492.6,2667.6 ; U1.20 1556.61,3012.91 1561.69,3007.83 1580.75,3007.83 C1.2 1718.81,2869.77 1718.81,2713.81 1672.6,2667.6 ; D1.2 1855.83,2667.6 1672.6,2667.6 ; 1492.6,2667.6 1672.6,2667.6
#DTR: R8.1 T2.2 U1.2 | length 645.6
  Top Layer w10: U1.2 1735.75,3552.09 1808.66,3625 1934.53,3625 2024.53,3715 R8.1 2091.73,3720 T2.2
#PWREN: U1.13 U3.4 | length 1291.5
  Top Layer w10: v1(1400,3429.89) 1454.25,3375.64 U1.13 ; v1(1405,4295) 1686.22,4295 U3.4@1705,4313.78
  Bottom Layer w10: v1(1400,3429.89) 1405,3434.89 v1(1405,4295)
#RST: C7.2 L10.3 R7.2 RST.1 RST.2 T1.3 U3.1 | length 2114.7
  Top Layer w10: RST.1 RST.2 L10.3 1550,4825 1595,4780 R7.2 ; C7.2 1481.43,4515 1585.83,4515 1595,4524.17 R7.2 ; v1(1760,3745) 1812.32,3745 T1.3 ; v1(1785,4540) 1705,4540 U3.1 R7.2
  Bottom Layer w10: v1(1760,3745) 1760,4515 v1(1785,4540)
#RTS: R10.2 T1.2 U1.3 | length 585.2
  Top Layer w10: U1.3 1710.16,3587.28 1898.47,3775.59 T1.2 R10.2
#RXLED: L1.3 U1.22 | length 454.4
  Top Layer w10: L1.3 1444.13,3205 1521.42,3205 1607.8,3118.63 U1.22
#TXLED: L2.3 U1.23 | length 433.4
  Top Layer w10: L2.3 1504.71,3250 1633.39,3121.32 U1.23
AD0: P7.7 R25.1 U4.9 | length 477.1
  Top Layer w10: R25.1 P7.7 2479.96,3308.19 2479.96,3113.19 2530.12,3063.03 U4.9
CPOUT: C8.2 U4.20 | length 63.3
  Top Layer w10: U4.20 2856.34,3023.66 C8.2
D+: CN1.3 U1.15 | length 340.9
  Top Layer w10: CN1.3 1242.07,2826.46 1242.07,2877.07 1378.05,3013.05 1418.05,3013.05 1428.66,3023.66 U1.15
D-: CN1.2 U1.16 | length 467.4
  Top Layer w10: CN1.2 1215,2824.98 v1(1215,2915) ; v1(1381.64,2938.36) 1385,2941.72 1373.28,2953.43 1373.28,2980 1386.34,2993.05 1436.95,2993.05 1454.25,3010.36 U1.16
  Bottom Layer w10: v1(1215,2915) 1230,2915 1260,2945 1375,2945 v1(1381.64,2938.36)
EN: R9.2 U3.3 | length 101
  Top Layer w10: R9.2 1692.48,4390 U3.3
GND: B1.1 C1.1 C2.1 C3.1 C4.1 C5.2 C6.1 C7.1 C8.1 C9.1 C10.1 C11.1 CN1.5 L3.3 P1.1 P2.1 P6.1 P7.2 PROG.3 PROG.4 R11.1 R16.2 R20.2 R21.2 R25.2 RST.3 RST.4 U1.7 U1.18 U1.21 U1.25 U1.26 U2.1 U3.15 U4.1 U4.11 U4.18 | length 3960.7
  Top Layer w10: v1(1135,3930) R20.2 ; v1(1135,4075) R21.2 ; v1(1135.47,4210.47) R16.2 ; v1@1137.83,4380 v1(1137.83,4385) RST.3 RST.4 ; CN1.5 1292.85,2826.06 1292.85,2866.04 v1(1321.81,2895) ; C7.1 1491.85,4426.85 v1(1525,4460) ; v1(1485.43,2785.43) C3.1 ; U1.18 1504.85,3064.75 v1(1504.85,3165) 1549.34,3120.51 1577.13,3120.51 1582.2,3115.44 U1.21 ; C6.1 v1(1643.15,3891.85) ; U1.7 1607.8,3247.2 v1(1690,3165) ; v1(1625.43,2785) C1.1 ; U1.25 1684.57,3159.57 v1(1690,3165) ; U1.26 1710.16,3144.84 v1(1690,3165) ; C4.1 1982.44,3098.15 U2.1 v1(1984.45,3180) ; C2.1 1875,3360 v1(1915,3400) ; P2.1 C5.2 v1(2182.36,3445) ; P1.1 v1(2275,2770) ; U3.15 2285.55,3944.45 v1(2365,3865) ; v1(2374.96,2978.19) 2448.66,2978.19 C11.1@2453.66,2983.19 ; v1(2374.96,3153.19) 2420.2,3153.19 2448.5,3124.88 C10.1@2451.81,3128.19 ; L3.3 2393.15,3595 2403.15,3585 v1(2465,3585) 2465,3473.15 R25.2 ; PROG.3 PROG.4 v1(2813.27,4790) ; R11.1 v1(2525,4075) ; v1(2559.96,2898.19) 2594.96,2933.19 2594.96,2999.57 2618.58,3023.19 2635.75,3023.19 U4.11 ; C9.1 v1(2733.66,2796.89) ; v1(2740,3210) 2764.17,3185.83 U4.1 ; v1(2764.17,2898.19) U4.18 ; v1(2765,4535) P6.1 ; v1@2870,3770.59 v1(2870.59,3770) B1.1 ; v1(2963.11,2945.04) C8.1 ; v1(2969.96,3228.19) P7.2
GPIO0: R13.2 R15.2 T2.3 U3.18 | length 1429.1
  Top Layer w10: T2.3 v1(2230,3745) ; v1(2210,4235) 2080,4365 2080,4446.57 2143.43,4510 2329.76,4510 2345.7,4525.94 R15.2 ; v1(2210,4235) U3.18 2405.43,4235.04 R13.2
  Bottom Layer w10: v1(2210,4235) 2210,4020 2230,4000 v1(2230,3745)
GPIO2: R12.2 U3.17 | length 125.9
  Top Layer w10: U3.17 2409.65,4156.3 R12.2
GPIO15: R11.2 R22.1 U3.16 | length 206.5
  Top Layer w10: U3.16 2408.39,4077.56 R11.2 R22.1
INT: P7.8 U4.12 | length 858.3
  Top Layer w10: P7.8 2324.96,3273.19 2324.96,3138.19 2374.96,3088.19 2454.96,3088.19 2494.96,3048.19 2494.96,2873.19 2519.96,2848.19 2584.96,2848.19 2614.96,2878.19 2614.96,2982.72 U4.12
LED0: L4.1 U3.5 | length 350
  Top Layer w10: L4.1 U3.5 U3.5
LED4: L8.1 U3.7 | length 403.9
  Top Layer w10: L8.1 1397.32,3947.32 1527.56,4077.56 U3.7
LED5: L9.1 U3.6 | length 376.5
  Top Layer w10: L9.1 1462.32,4092.32 1526.3,4156.3 U3.6
NetB1_2: B1.2 R22.2 | length 333.2
  Top Layer w10: R22.2 2638.75,3826.25 2695,3770 B1.2
NetC3_2: C3.2 U1.17 | length 103.3
  Top Layer w10: U1.17 1479.84,2968.74 C3.2
NetC4_2: C4.2 D1.1 D2.1 U2.3 | length 403.8
  Top Layer w10: C4.2 2003.15,2991.85 D1.1 D2.1 2170,3091.69 U2.3
NetL1_1: L1.1 R4.1 | length 78
  Top Layer w10: R4.1 1207.36,3105 L1.1
NetL2_1: L2.1 R5.1 | length 87.7
  Top Layer w10: R5.1 1211.85,3295.47 L2.1
NetL3_1: L3.1 R6.1 | length 67.5
  Top Layer w10: R6.1 2291.85,3640 L3.1
NetL4_3: L4.3 R16.1 | length 56.5
  Top Layer w10: R16.1 1249.17,4275 L4.3
NetL8_3: L8.3 R20.1 | length 57
  Top Layer w10: R20.1 1249.17,3990 L8.3
NetL9_3: L9.3 R21.1 | length 57
  Top Layer w10: R21.1 1249.17,4135 L9.3
NetL10_1: L10.1 R14.1 | length 61
  Top Layer w10: R14.1 1519.49,4729.02 L10.1
NetPROG_1: PROG.1 PROG.2 R15.1 | length 446.1
  Top Layer w10: R15.1 PROG.1 PROG.2
NetR1_1: R1.1 U1.1 | length 161
  Top Layer w10: U1.1 1860,3434.49 R1.1@1860,3455.94
NetR2_1: R2.1 U1.5 | length 140.1
  Top Layer w10: U1.5 1660,3336.85 R2.1
NetR3_2: R3.2 U1.19 | length 135.1
  Top Layer w10: U1.19 1531.02,2993.89 1556.38,2968.54 R3.2
NetR8_2: R8.2 T1.1 | length 67.3
  Top Layer w10: T1.1 1961.06,3724.41 R8.2
NetR10_1: R10.1 T2.1 | length 69.4
  Top Layer w10: R10.1 2087.32,3775.59 T2.1
REGOUT: C11.2 U4.10 | length 110
  Top Layer w10: C11.2@2559.96,2983.19 2559.96,2998.19 2605.12,3043.35 U4.10
RXD: R1.2 U3.21 | length 1296.3
  Top Layer w10: R1.2 v1(1860,3575) ; v1(2160,4470) 2284.29,4470 U3.21 U3.21@2251.26,4471.26
  Bottom Layer w10: v1(1860,3575) 1860,4300 2030,4470 v1@2140,4470
SCL: P6.3 P7.3 R24.1 U3.20 U4.23 | length 2019.4
  Top Layer w10: U3.20 2452.05,4392.52 R24.1 2809.53,4395.47 P6.3 2915,4290 2915,3870.98 2780,3735.98 2780,3408.15 P7.3 2869.96,3136.78 2815.9,3082.72 U4.23
SDA: P6.4 P7.4 R23.1 U3.19 U4.24 | length 1866.9
  Top Layer w10: U3.19 2581.22,4313.78 2664.53,4230.47 R23.1 2865.47,4230.47 P6.4 2885,4220 2885,3880 2750,3745 2750,3338.15 P7.4 2769.96,3243.19 2829.96,3183.19 2829.96,3133.19 2799.17,3102.4 U4.24
TXD: R2.2 U3.22 | length 1494.6
  Top Layer w10: R2.2 v1(1660,3605) ; v1(2150,4550) U3.22
  Bottom Layer w10: v1(1660,3605) 1715,3605 1805,3695 1805,4390 1965,4550 v1(2150,4550)
VEXT: D2.2 P1.2 | length 118.8
  Top Layer w10: D2.2 2170,2705 P1.2
VLOGIC: C10.2 U4.8 | length 96.9
  Top Layer w10: C10.2@2558.11,3128.19 2603.58,3082.72 U4.8
XCL: P7.6 U4.7 | length 242
  Top Layer w10: P7.6 2569.96,3208.19 2614.96,3163.19 2614.96,3124.88 U4.7@2636.22,3103.62
XDA: P7.5 U4.6 | length 191.7
  Top Layer w10: U4.6@2664.53,3131.93 2664.53,3318.19 P7.5
pads on no net: CN1.4 CN1.6 CN1.7 CN1.8 CN1.9 CN1.10 CN1.11 L1.2 L2.2 L3.2 L4.2 L8.2 L9.2 L10.2 U1.6 U1.8 U1.9 U1.10 U1.11 U1.12 U1.14 U1.24 U1.27 U1.28 U2.4 U3.2 U3.9 U3.10 U3.11 U3.12 U3.13 U3.14 U4.2 U4.3 U4.4 U4.5 U4.14 U4.15 U4.16 U4.17 U4.19 U4.21 U4.22 U4.25

## Polygon pours and split planes (outlines as drawn)
GND on Bottom Layer "Bottom Layer-GND" (solid, pour order 30): 1000,5005 1635,5005 1635,4596.61 1633.39,4595 2345,4595 2345,5005 3175,5005 3175,2615 1000,2615

## Keep-outs
Keep-Out Layer:
  the board outline again, w10

## Other copper
Top Layer:
  pour cut-out: 1055,4995
  pour cut-out: 1045,4995

## Silkscreen, mask and mechanical layers (free items; w line width, h text height)
Top Overlay:
  circle w10: c2969.96,2805 r18
  circle w11: c1960,3585 r5
  circle w11: c2105,2660 r5
  region: 80 vertices and 5 holes, not listed, extent 2946,4768 3138,4976
  lines w10: 2955,2665 2969.96,2650.04 ; 2985,2665 2970.04,2650.04 2969.96,2650.04 ; 3120,2790 3135,2805 ; 3120,2820 3135,2805 ; 2969.96,2650.04 2969.96,2650 2969.96,2805 3135,2805
  text "ECUBElab" at 1780,4920 h60
  text "PROG" at 2525,4916 h60
  text "RST" at 1155,4900 h60
  text "Gabriel & JC" at 3140,4050 h60 r90
  text "PWR" at 2310,3695 h60
  text "TX" at 1200,3340 h60
  text "RX" at 1040,2995 h60
  text "Y" at 3120,2832.2 h60
  text "Z" at 3000,2828.78 h60
  text "X" at 2900,2650.04 h60